# EAGLE board CT_schematic (EAGLE 7.6.0)

Size 100 x 80 mm. Coordinates in mm from the lower left corner, seen from the top.
Outline: 0,0 100,0 100,80 0,80 0,0
Copper layers (1*16): Top 0.035mm / dielectric 1.5mm / Bottom 0.035mm
Design rules "default": minimum track width 10mil, minimum drill 24mil, track to track 8mil, track to pad 8mil, pad to pad 8mil, via to via 8mil, smd to smd 8mil, copper to edge 40mil, drill to drill 8mil, minimum pad ring 10mil, minimum via ring 8mil, stop-mask expansion 4mil, vias tented up to drill 0mil, thermal gap 10mil

## Footprints (pad centres in the part's own frame; a part is rotated, then mirrored left to right if it is on the bottom)
C0603 = smd 0.8 x 0.8: 1 -0.762,0; 2 0.762,0
C0402 = smd 0.5 x 0.5: 1 -0.508,0; 2 0.508,0
C0805 = smd 1.2 x 1.3: 1 -1.016,0; 2 1.016,0
C1210 = smd 1.2 x 2.5: 1 -1.524,0; 2 1.524,0
EXV-9H = smd 3.505 x 1.676: 1 -2.857,0; 2 2.857,0
L0603 = smd 0.8 x 0.8: 1 -0.762,0; 2 0.762,0
PJ-037B_PACKAGE = drill 3.7 square: 1 12,0 | drill 3.2 square: 2 6,0
R0603 = smd 0.8 x 0.8: 1 -0.762,0; 2 0.762,0
LQFP48 = smd 0.3 x 1.2: 1 -2.75,-4.25; 2 -2.25,-4.25; 3 -1.75,-4.25; 4 -1.25,-4.25; 5 -0.75,-4.25; 6 -0.25,-4.25; 7 0.25,-4.25; 8 0.75,-4.25; 9 1.25,-4.25; 10 1.75,-4.25; 11 2.25,-4.25; 12 2.75,-4.25; 25 2.75,4.25; 26 2.25,4.25; 27 1.75,4.25; 28 1.25,4.25; 29 0.75,4.25; 30 0.25,4.25; 31 -0.25,4.25; 32 -0.75,4.25; 33 -1.25,4.25; 34 -1.75,4.25; 35 -2.25,4.25; 36 -2.75,4.25 | smd 1.2 x 0.3: 13 4.25,-2.75; 14 4.25,-2.25; 15 4.25,-1.75; 16 4.25,-1.25; 17 4.25,-0.75; 18 4.25,-0.25; 19 4.25,0.25; 20 4.25,0.75; 21 4.25,1.25; 22 4.25,1.75; 23 4.25,2.25; 24 4.25,2.75; 37 -4.25,2.75; 38 -4.25,2.25; 39 -4.25,1.75; 40 -4.25,1.25; 41 -4.25,0.75; 42 -4.25,0.25; 43 -4.25,-0.25; 44 -4.25,-0.75; 45 -4.25,-1.25; 46 -4.25,-1.75; 47 -4.25,-2.25; 48 -4.25,-2.75
LGA14R35P5X6_200X200X100 = smd 0.35 x 0.15: 1 -0.8,0.525; 2 -0.8,0.175; 3 -0.8,-0.175; 4 -0.8,-0.525; 8 0.8,-0.525; 9 0.8,-0.175; 10 0.8,0.175; 11 0.8,0.525 | smd 0.15 x 0.35: 5 -0.35,-0.8; 6 0,-0.8; 7 0.35,-0.8; 12 0.35,0.8; 13 0,0.8; 14 -0.35,0.8
SSOP-28 = smd 1.5 x 0.4: 1 -3.625,4.225; 2 -3.625,3.575; 3 -3.625,2.925; 4 -3.625,2.275; 5 -3.625,1.625; 6 -3.625,0.975; 7 -3.625,0.325; 8 -3.625,-0.325; 9 -3.625,-0.975; 10 -3.625,-1.625; 11 -3.625,-2.275; 12 -3.625,-2.925; 13 -3.625,-3.575; 14 -3.625,-4.225; 15 3.625,-4.225; 16 3.625,-3.575; 17 3.625,-2.925; 18 3.625,-2.275; 19 3.625,-1.625; 20 3.625,-0.975; 21 3.625,-0.325; 22 3.625,0.325; 23 3.625,0.975; 24 3.625,1.625; 25 3.625,2.275; 26 3.625,2.925; 27 3.625,3.575; 28 3.625,4.225
FCI_10118193-0001LF = smd 0.4 x 1.35: 1 -1.3,2.675; 2 -0.65,2.675; 3 0,2.675; 4 0.65,2.675; 5 1.3,2.675 | smd 1.6 x 1.4: 6 -3.2,2.45; 7 3.2,2.45 | smd 1.9 x 1.9: 8 -1.2,0; 9 1.2,0 | hole 0.5: -3.3,0; 3.3,0
DFN-10 = smd 0.965 x 0.305: 1 -1.321,1; 2 -1.321,0.5; 3 -1.321,0; 4 -1.321,-0.5; 5 -1.321,-1; 6 1.321,-1; 7 1.321,-0.5; 8 1.321,0; 9 1.321,0.5; 10 1.321,1
RFM75-S = smd 0.85 x 1.6: 1 1.7,0.8; 2 2.97,0.8; 3 4.24,0.8; 4 5.51,0.8; 5 6.78,0.8; 6 8.05,0.8; 7 9.32,0.8; 8 10.59,0.8
ABLS-25.000MHZ-B2F-T = smd 5.6 x 2.8: 1 -3.81,0; 2 5.69,0
ASEK = smd 1.4 x 1: 1 -1.1,-0.8; 2 1.1,-0.8; 3 1.1,0.8; 4 -1.1,0.8
ASFL1 = smd 1.7 x 1.5: 1 -1.27,-1.1; 2 1.27,-1.1; 3 1.27,1.1; 4 -1.27,1.1
WSON-8 = smd 0.3 x 0.6: 1 -0.75,0; 2 0.05,0; 3 0.85,0; 4 1.65,0; 5 1.65,3.8; 6 0.85,3.8; 7 0.05,3.8; 8 -0.75,3.8 | smd 3 x 2.6: PAD 0.45,1.9
SON-6 = smd 0.55 x 0.3: 1 -0.355,0.5 | smd 0.52 x 0.3: 2 -0.37,0; 3 -0.37,-0.5; 4 0.37,-0.5; 5 0.37,0; 6 0.37,0.5
SW_4-1437565-2 = smd 1.4 x 2.1: 1 -2.23,4.55; 2 -2.23,-4.55; 3 2.23,4.55; 4 2.23,-4.55
LGM67K-G1J2-24-Z = smd 0.8 x 1.4: A -2,0; C 0,0
NC7SZ125M5X = smd 1.3 x 0.7: 1 -1.3,0.95; 2 -1.3,0; 3 -1.3,-0.95; 4 1.3,-0.95; 5 1.3,0.95

## Placement (x,y rotation side)
C1  1e-06  [C0603]  -38.1,60.96 0 top  (outside the outline)
C2  1e-07  [C0603]  -41.91,60.96 0 top  (outside the outline)
C3  1e-07  [C0603]  -45.72,60.96 0 top  (outside the outline)
C4  1e-07  [C0603]  -49.53,60.96 0 top  (outside the outline)
C5  1e-07  [C0603]  -53.34,60.96 0 top  (outside the outline)
C6  1e-07  [C0603]  -57.15,60.96 0 top  (outside the outline)
C7  4.7e-06  [C0603]  -34.29,60.96 0 top  (outside the outline)
C8  1e-08  [C0603]  -60.96,60.96 0 top  (outside the outline)
C9  1e-08  [C0603]  -64.77,60.96 0 top  (outside the outline)
C10  1e-06  [C0603]  -68.58,60.96 0 top  (outside the outline)
C11  1e-11  [C0402]  -21.59,71.12 0 top  (outside the outline)
C12  1e-11  [C0402]  -25.4,71.12 0 top  (outside the outline)
C13  1e-07  [C0402]  -29.21,71.12 0 top  (outside the outline)
C14  1e-07  [C0402]  -33.02,71.12 0 top  (outside the outline)
C15  1e-07  [C0402]  -36.83,71.12 0 top  (outside the outline)
C16  4.7e-06  [C0805]  -27.94,54.61 0 top  (outside the outline)
C17  1e-07  [C0402]  -40.64,71.12 0 top  (outside the outline)
C18  1e-07  [C0402]  -44.45,71.12 0 top  (outside the outline)
C19  1e-07  [C0402]  -48.26,71.12 0 top  (outside the outline)
C20  1e-07  [C0402]  -52.07,71.12 0 top  (outside the outline)
C21  1e-06  [C0603]  -15.24,66.04 0 top  (outside the outline)
C22  1e-07  [C0402]  -55.88,71.12 0 top  (outside the outline)
C23  1e-07  [C0402]  -59.69,71.12 0 top  (outside the outline)
C24  1e-07  [C0402]  -63.5,71.12 0 top  (outside the outline)
C25  1e-06  [C0603]  -19.05,66.04 0 top  (outside the outline)
C26  1e-08  [C0402]  -67.31,71.12 0 top  (outside the outline)
C27  1e-08  [C0402]  -15.24,76.2 0 top  (outside the outline)
C28  1e-08  [C0402]  -19.05,76.2 0 top  (outside the outline)
C29  1e-05  [C1210]  -68.58,48.26 0 top  (outside the outline)
C30  1e-05  [C1210]  -16.51,55.88 0 top  (outside the outline)
C31  1e-07  [C0402]  -22.86,76.2 0 top  (outside the outline)
C32  0.0001  [EXV-9H]  -66.04,39.37 0 top  (outside the outline)
C33  0.0001  [EXV-9H]  -17.78,48.26 0 top  (outside the outline)
C34  1e-08  [C0402]  -26.67,76.2 0 top  (outside the outline)
F1  240.0  [L0603]  -22.86,66.04 0 top  (outside the outline)
J1  PJ-037B  [PJ-037B_PACKAGE]  -55.88,7.62 0 top  (outside the outline)
R1  10000.0  [R0603]  -48.26,54.61 0 top  (outside the outline)
R2  1000.0  [R0603]  -26.67,66.04 0 top  (outside the outline)
R3  1600.5  [R0603]  -30.48,66.04 0 top  (outside the outline)
R4  4700.0  [R0603]  -34.29,66.04 0 top  (outside the outline)
R5  2200.0  [R0603]  -38.1,66.04 0 top  (outside the outline)
R6  2200.0  [R0603]  -41.91,66.04 0 top  (outside the outline)
R7  2200.0  [R0603]  -45.72,66.04 0 top  (outside the outline)
R8  2200.0  [R0603]  -49.53,66.04 0 top  (outside the outline)
R9  10000.0  [R0603]  -53.34,54.61 0 top  (outside the outline)
R10  10000.0  [R0603]  -58.42,54.61 0 top  (outside the outline)
R11  4700.0  [R0603]  -53.34,66.04 0 top  (outside the outline)
R12  10000.0  [R0603]  -63.5,54.61 0 top  (outside the outline)
R13  10000.0  [R0603]  -68.58,54.61 0 top  (outside the outline)
R14  10000.0  [R0603]  -15.24,60.96 0 top  (outside the outline)
R15  10000.0  [R0603]  -20.32,60.96 0 top  (outside the outline)
R16  100000.0  [R0603]  -33.02,54.61 0 top  (outside the outline)
R17  2231.0  [R0603]  -57.15,66.04 0 top  (outside the outline)
R18  1000.0  [R0603]  -60.96,66.04 0 top  (outside the outline)
R19  10000.0  [R0603]  -25.4,60.96 0 top  (outside the outline)
R20  10000.0  [R0603]  -30.48,60.96 0 top  (outside the outline)
R21  9100.0  [R0603]  -64.77,66.04 0 top  (outside the outline)
R22  680000.0  [R0603]  -38.1,54.61 0 top  (outside the outline)
R23  120000.0  [R0603]  -43.18,54.61 0 top  (outside the outline)
U1  STM32F102CBT6  [LQFP48]  -44.45,29.21 0 top  (outside the outline)
U2  BMC150  [LGA14R35P5X6_200X200X100]  -63.5,48.26 0 top  (outside the outline)
U3  FT232RL-REEL  [SSOP-28]  -35.56,7.62 0 top  (outside the outline)
U4  10118193-0001LF  [FCI_10118193-0001LF]  -35.56,39.37 0 top  (outside the outline)
U5  MAG3110FCR1  [DFN-10]  -15.24,71.12 0 top  (outside the outline)
U6  RFM75-S  [RFM75-S]  -26.67,3.81 0 top  (outside the outline)
U7  ABLS-25.000MHZ-B2F-T  [ABLS-25.000MHZ-B2F-T]  -36.83,48.26 0 top  (outside the outline)
U8  ASEK-32.768KHz-ECST  [ASEK]  -57.15,39.37 0 top  (outside the outline)
U9  ASFL1-12MHZ-NCS  [ASFL1]  -26.67,39.37 0 top  (outside the outline)
U10  LP3878SDX-ADJ/NOPB  [WSON-8]  -67.31,26.67 0 top  (outside the outline)
U11  TPS3895ADRYR  [SON-6]  -29.21,74.93 0 top  (outside the outline)
U12  4-1437565-2  [SW_4-1437565-2]  -27.94,29.21 0 top  (outside the outline)
U13  Q65110A2395  [LGM67K-G1J2-24-Z]  -48.26,48.26 0 top  (outside the outline)
U14  nc7sz125m5x  [NC7SZ125M5X]  -21.59,54.61 0 top  (outside the outline)

## Library data of the parts
C1-C34 F1 J1 R1-R23 U1-U14 = circuit_tree

## Nets
CLK_CRYSTAL_U1_5: C11.1 U1.5 U7.1
CLK_CRYSTAL_U1_6: C12.1 U1.6 U7.2
CLK_U1_3: U1.3 U8.3
CLK_U3_27: U3.27 U9.3
GND: C1.2 C2.2 C3.2 C4.2 C5.2 C6.2 C7.2 C8.2 C9.2 C10.2 C11.2 C12.2 C13.2 C14.2 C15.2 C16.2 C17.2 C18.2 C19.2 C20.2 C21.2 C22.2 C23.2 C24.2 C25.2 C26.2 C27.2 C28.2 C29.2 C30.2 C31.2 C32.2 C33.2 C34.2 J1.2 R2.2 R9.2 R13.2 R18.2 R21.2 R23.2 U1.8 U1.23 U1.35 U1.47 U2.1 U2.6 U2.7 U2.9 U3.7 U3.18 U3.21 U3.25 U3.26 U4.5 U4.6 U4.7 U4.8 U4.9 U5.5 U5.10 U6.1 U8.2 U9.2 U10.3 U10.PAD U11.2 U13.C U14.1 U14.3
NET_U1_7: R4.1 U1.7 U14.4
NET_U1_9: C8.1 C9.1 C10.1 F1.1 U1.9
NET_U1_21: R7.1 U1.21 U2.11
NET_U1_22: R8.1 U1.22 U2.14
NET_U1_42: R5.1 U1.42 U5.7
NET_U1_43: R6.1 U1.43 U5.6
NET_U1_44: R9.1 U1.44
NET_U1_45: R3.1 U1.45 U13.A
NET_U1_46: R1.1 U1.46 U12.3 U12.4
NET_U3_14: R12.1 U3.14
NET_U3_17: C17.1 U3.17
NET_U3_19: R13.1 U3.19
NET_U4_1: R11.1 U4.1
NET_U4_2: U3.16 U4.2
NET_U4_3: U3.15 U4.3
NET_U4_19: R11.2
NET_U5_1: C19.1 U5.1
NET_U5_4: C22.1 U5.4
NET_U6_3: R14.1 U6.3
NET_U10_1: C28.1 U10.1
NET_U10_6: R17.2 R18.1 U10.6
NET_U10_8: R16.1 U10.8
NET_U11_1: R20.1 R21.1 U11.1
NET_U11_3: R22.2 R23.1 U11.3
NET_U11_4: R19.1 U11.4 U14.2
NET_U12_1: R2.1 U12.1 U12.2
PROC_SPI1_MISO: U1.16 U6.7
PROC_SPI1_MOSI: U1.17 U6.6
PROC_SPI1_NSS: R15.1 U1.14 U6.4
PROC_SPI1_SCK: U1.15 U6.5
PROC_USART1_CTS: U1.32 U3.3
PROC_USART1_RTS: U1.33 U3.11
PROC_USART1_RX: U1.31 U3.1
PROC_USART1_TX: U1.30 U3.5
VCC_S1_13V2: C29.1 C32.1 C33.1 J1.1 R16.2 U10.4
VCC_TIER1_3V3: C1.1 C2.1 C3.1 C4.1 C5.1 C6.1 C7.1 C13.1 C14.1 C15.1 C16.1 C18.1 C20.1 C21.1 C23.1 C24.1 C25.1 C26.1 C27.1 C30.1 C31.1 C34.1 F1.2 R1.2 R3.2 R4.2 R5.2 R6.2 R7.2 R8.2 R10.1 R10.2 R12.2 R14.2 R15.2 R17.1 R19.2 R20.2 R22.1 U1.1 U1.24 U1.36 U1.48 U2.8 U2.10 U2.12 U2.13 U3.4 U3.20 U5.2 U5.8 U6.2 U8.4 U9.4 U10.5 U11.6 U14.5

## Tracks (layer width: path | path; a pad name or v marks a point on that pad's centre or on a via)
CLK_CRYSTAL_U1_5  (2 unrouted)
CLK_CRYSTAL_U1_6  (2 unrouted)
CLK_U1_3  (1 unrouted)
CLK_U3_27  (1 unrouted)
GND  (69 unrouted)
NET_U1_7  (2 unrouted)
NET_U1_9  (4 unrouted)
NET_U1_21  (2 unrouted)
NET_U1_22  (2 unrouted)
NET_U1_42  (2 unrouted)
NET_U1_43  (2 unrouted)
NET_U1_44  (1 unrouted)
NET_U1_45  (2 unrouted)
NET_U1_46  (3 unrouted)
NET_U3_14  (1 unrouted)
NET_U3_17  (1 unrouted)
NET_U3_19  (1 unrouted)
NET_U4_1  (1 unrouted)
NET_U4_2  (1 unrouted)
NET_U4_3  (1 unrouted)
NET_U5_1  (1 unrouted)
NET_U5_4  (1 unrouted)
NET_U6_3  (1 unrouted)
NET_U10_1  (1 unrouted)
NET_U10_6  (2 unrouted)
NET_U10_8  (1 unrouted)
NET_U11_1  (2 unrouted)
NET_U11_3  (2 unrouted)
NET_U11_4  (2 unrouted)
NET_U12_1  (2 unrouted)
PROC_SPI1_MISO  (1 unrouted)
PROC_SPI1_MOSI  (1 unrouted)
PROC_SPI1_NSS  (2 unrouted)
PROC_SPI1_SCK  (1 unrouted)
PROC_USART1_CTS  (1 unrouted)
PROC_USART1_RTS  (1 unrouted)
PROC_USART1_RX  (1 unrouted)
PROC_USART1_TX  (1 unrouted)
VCC_S1_13V2  (5 unrouted)
VCC_TIER1_3V3  (56 unrouted)